# Allegro board Fly_2_0425p1.brd
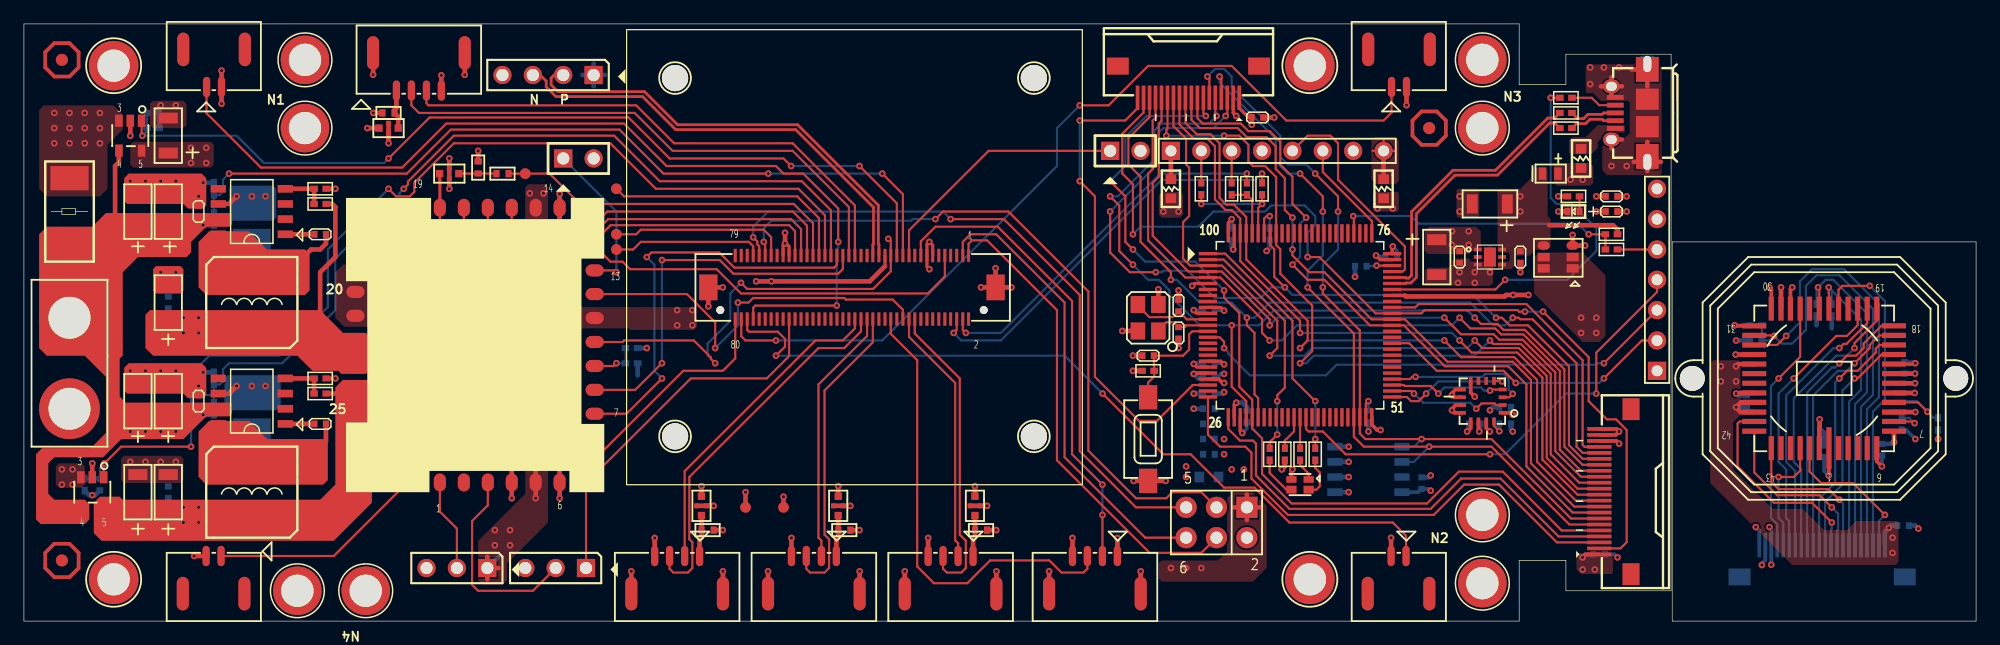
[diagram p0: board, top side]
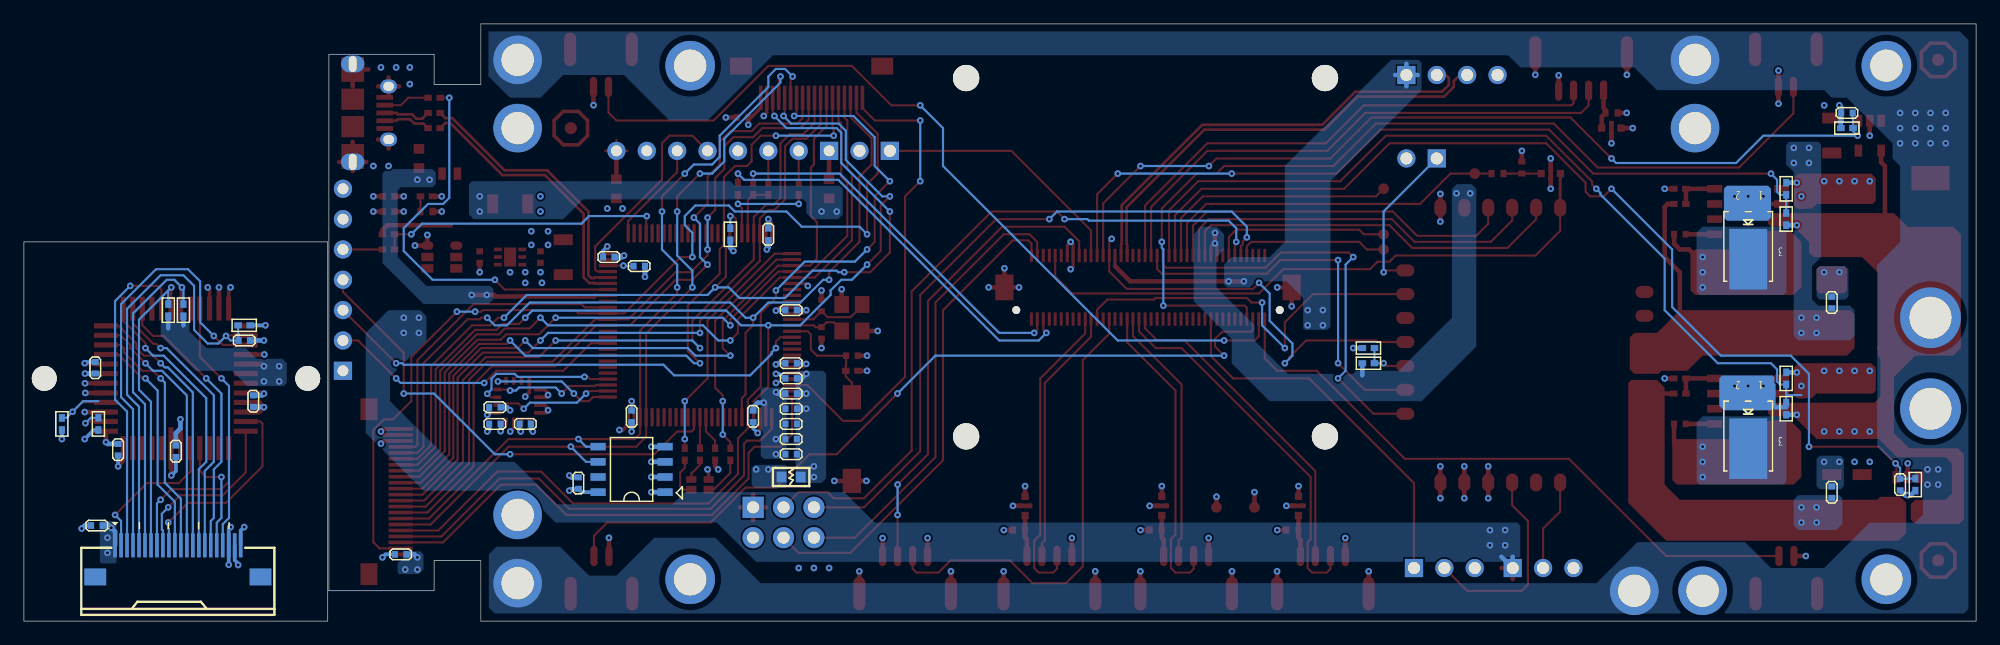
[diagram p1: board, bottom side, seen from below]

Outline 163.19 x 50 mm; copper layers: TOP, GND02, PWR03, BOTTOM. Coordinates in mm from the lower left corner of the outline.
Outline path: 0,50 125,50 125,44.92 128.91,44.92 128.91,47.46 137.7,47.46 137.7,2.54 128.91,2.54 128.91,5.08 125,5.08 125,0 0,0 0,50 ; 137.79,31.75 137.79,0 163.19,0 163.19,31.75 137.79,31.75

## Design rules (mm)
net group D_N: nets D_N NETR26_1
net group D_P: nets D_P NETR28_1
net group OTG_D1: nets OTG_DM1 OTG_DP1

## Placement (name value [footprint] x y rotation side)
C1  0u1_25v  [C0402]  6.35 11.43 90 bottom
C2  10u  [C1206]  12.06 18.41 90 top
C3  10u  [C1206]  9.53 18.41 90 top
C4  0u1_25v  [C0402]  14.61 18.41 90 top
C5  0.01_25v  [C0402]  24.77 16.51 0 top
C6  10u  [C1206]  9.53 10.79 90 top
C7  220u  [C1206]  12.06 10.79 90 top
C8  0u1_25v  [C0402]  12.06 10.79 90 bottom
C9  10u  [C1206]  9.53 34.29 90 top
C10  10u  [C1206]  12.06 34.29 90 top
C11  0u1_25v  [C0402]  14.61 34.29 90 top
C12  0u1_25v  [C0402]  10.79 42.55 180 bottom
C13  0.01_25v  [C0402]  24.77 32.38 0 top
C14  220u  [C1206]  12.06 26.67 90 top
C15  10u  [C1206]  12.06 40.64 90 top
C16  0u1_25v  [C0402]  12.06 26.67 90 bottom
C17  0.1u_25v  [C0402]  155.32 14.35 90 bottom
C18  0.1u_25v  [C0402]  157.23 21.21 270 bottom
C19  0.1u_25v  [C0402]  150.5 14.22 90 bottom
C20  0.1u_25v  [C0402]  99.06 17.78 0 bottom
C21  0.1u_25v  [C0402]  99.06 19.05 0 bottom
C22  0.1u_25v  [C0402]  99.06 20.32 0 bottom
C23  0.1u_25v  [C0402]  144.78 23.5 180 bottom
C24  0.01u_25v  [C0402]  132.72 34.29 180 top
C25  2.2u_25v  [C0402]  132.72 35.56 180 top
C26  0.1u_25v  [C0402]  123.83 16.51 0 bottom
C27  0.01u_25v  [C0402]  121.28 16.51 180 bottom
C28  8p_25v  [C0402]  96.52 24.13 270 top
C29  8p_25v  [C0402]  96.52 26.42 270 top
C30  2.2u_25v  [C0402]  93.98 22.23 180 top
C31  2.2u_25v  [C0402]  111.76 29.72 0 bottom
C32  2.2u_25v  [C0402]  112.39 17.14 90 bottom
C33  0.1u_25v  [C0402]  99.06 13.97 0 bottom
C34  0.01u_25v  [C0402]  99.06 15.24 0 bottom
C35  0.1u_25v  [C0402]  99.06 16.51 0 bottom
C36  0.1u_25v  [C0402]  120.02 30.48 270 top
C37  2.2u_25v  [C1206]  118.11 30.48 270 top
C38  0.1u_25v  [C0402]  125.09 30.48 270 top
C39  2.2u_25v  [C1206]  122.56 34.92 180 top
C40  0.01u_25v  [C0402]  99.06 21.59 0 bottom
C41  0.01u_25v  [C0402]  100.97 32.38 90 bottom
C42  0.01u_25v  [C0402]  114.3 30.48 0 bottom
C43  0.01u_25v  [C0402]  102.23 17.14 270 bottom
C44  0.01u_25v  [C0402]  99.06 26.04 180 bottom
C45  0.01u_25v  [C0402]  123.83 17.91 0 bottom
C46  0.01u_25v  [C0402]  131.7 5.59 180 bottom
C47  0.01u_25v  [C0402]  157.1 8 180 bottom
C48  0.01u_25v  [C0402]  144.02 18.41 270 bottom
C49  0.01u_25v  [C0402]  103.12 42.16 180 top
C50  0.1u_25v  [C0402]  116.84 11.56 90 bottom
D1  DIODE-TVS  [0402-TVS]  57.15 7.62 0 top
D2  DIODE-TVS  [0402-TVS]  68.58 7.62 0 top
D3  DIODE-TVS  [0402-TVS]  30.48 42.55 180 top
D4  DIODE-TVS  [0402-TVS]  80.01 7.62 0 top
D5  DIODE-TVS  [0402-TVS]  37.97 37.97 90 top
D6  -  [TO-277A]  19.05 18.41 0 bottom
D7  TO-227A  [TO-277A]  19.05 34.29 0 bottom
D8  schottky  [D0603]  127.64 37.47 180 top
D9  RED  [LED0402]  129.54 34.29 180 top
D300  DIODE-TVS  [0402-TVS]  40.01 37.47 0 top
J1  miniUSB  [USBMICRO5_6A]  137.16 42.55 90 top
K1  TPS5430  [HSOIC-8]  19.05 18.41 90 top
K2  TPS5430  [HSOIC-8]  19.05 34.29 90 top
K3  INA169  [SOT-23-5]  5.71 10.79 180 top
K4  INA169  [SOT-23-5]  8.89 40.64 180 top
L1  Kyocera_KNH16C104DA5TS_EMI_filter  [KYOCERA-KNH16-DA]  56.64 9.65 270 top
L2  Kyocera_KNH16C104DA5TS_EMI_filter  [KYOCERA-KNH16-DA]  68.07 9.65 270 top
L3  Kyocera_KNH16C104DA5TS_EMI_filter  [KYOCERA-KNH16-DA]  30.48 41.27 0 top
L4  Kyocera_KNH16C104DA5TS_EMI_filter  [KYOCERA-KNH16-DA]  79.5 9.65 270 top
L5  Kyocera_KNH16C104DA5TS_EMI_filter  [KYOCERA-KNH16-DA]  35.56 37.47 180 top
L6  Inductor  [CKCD5D28]  19.05 10.79 0 top
L7  Inductor  [CKCD5D28]  19.05 26.67 0 top
L8  EEBCRKIV  [L0603]  130.18 38.73 90 top
L9  EEBCRKIV  [L0603]  99.06 12.06 0 bottom
L10  EEBCRKIV  [L0603]  95.89 36.2 270 top
L11  EEBCRKIV  [L0603]  113.67 36.2 270 top
LED1  ltst-c19he1wt  [LTST-C19HE1WT]  106.68 11.43 270 top
N1  esc_power  [ESC_POWER]  23.5 46.99 270 top
N2  esc_power  [ESC_POWER]  121.92 3.17 90 top
N3  esc_power  [ESC_POWER]  121.92 46.99 270 top
N4  esc_power  [ESC_POWER]  28.57 2.54 180 top
N5  exc_control  [EXC_CONTROL]  14.61 0 180 top
N6  exc_control  [EXC_CONTROL]  116.2 50.16 0 top
N7  exc_control  [EXC_CONTROL]  113.67 0 180 top
N8  exc_control  [EXC_CONTROL]  17.14 50.16 0 top
NOREF  -  [unnamed]  117.47 41.27 0 top
NOREF#2  -  [unnamed#2]  54.43 45.47 0 top
NOREF#3  -  [unnamed]  3.17 5.08 0 top
NOREF#4  -  [unnamed#3]  7.5 46.5 0 top
NOREF#5  -  [unnamed#3]  107.5 3.5 0 top
NOREF#6  -  [unnamed#3]  107.5 46.5 0 top
NOREF#7  -  [unnamed]  3.17 46.99 0 top
NOREF#8  -  [unnamed#2]  54.43 15.47 0 top
NOREF#9  -  [unnamed#2]  84.43 15.47 0 top
NOREF#10  -  [unnamed#2]  84.43 45.47 0 top
NOREF#11  -  [unnamed#3]  7.5 3.5 0 top
P1  -  [CON-DF17-80M]  69.22 27.94 0 top
P2  Header_3X2  [HDR2X3]  99.69 8.26 180 top
P3  CLICKMATE_1.25_4  [CLICKMATE_V4]  54.61 0 180 top
P4  Header_2  [HDR1X2]  90.81 39.37 0 top
P5  CLICKMATE_1.25_4  [CLICKMATE_V4]  89.53 0 180 top
P6  CLICKMATE_1.25_4  [CLICKMATE_V4]  66.04 0 180 top
P7  CLICKMATE_1.25_4  [CLICKMATE_V4]  33.01 49.87 0 top
P8  Header_3  [HDR1X3]  46.99 4.45 180 top
P9  Header_3  [HDR1X3]  38.73 4.45 180 top
P10  CLICKMATE_1.25_4  [CLICKMATE_V4]  77.47 0 180 top
P11  Header_2  [HDR1X2]  45.09 38.73 0 top
P12  Header_4  [HDR1X4]  47.62 45.72 180 top
P13  Header_2  [VBAT_JACK]  3.81 25.4 270 top
P14  Header_7  [HDR1X7]  136.53 20.95 90 top
P15  Header_18  [FPC-18_0P5]  101.6 43.81 180 top
P16  Header_22  [FPC-22_0P5]  131.7 5.59 90 top
P17  Header_8  [HDR1X8]  95.89 39.37 0 top
P18  Header_22  [FPC-22_0P5]  155.57 6.35 180 bottom
PSM1  Power_Selection_module  [PSM]  37.47 22.86 90 top
Q1  NTGS4111P  [TSOP-6]  128.27 30.48 90 top
R1  0R  [R0402]  50.8 21.59 0 bottom
R2  0R  [R0402]  50.8 22.86 180 bottom
R3  0.005R  [2512]  3.81 34.29 90 top
R4  4.7k  [R0402]  24.77 20.32 0 top
R5  15k  [R0402]  24.77 19.05 180 top
R6  100k  [R0402]  5.08 11.43 270 bottom
R7  14k  [R0402]  15.88 17.78 270 bottom
R8  1k  [R0402]  15.88 20.32 270 bottom
R9  4.7k  [R0402]  24.77 36.2 0 top
R10  15k  [R0402]  24.77 34.92 180 top
R11  14k  [R0402]  15.88 33.66 270 bottom
R12  100k  [R0402]  10.79 41.27 0 bottom
R13  1k  [R0402]  15.88 36.2 270 bottom
R14  10k  [R0402]  144.78 24.77 180 bottom
R15  330R  [R0402]  149.86 26.04 90 bottom
R16  330R  [R0402]  151.13 26.04 90 bottom
R17  1k  [R0402]  132.72 32.38 180 top
R18  1k  [R0402]  156.97 16.51 270 bottom
R19  0R  [R0402]  132.72 31.11 0 top
R20  1k  [R0402]  160.02 16.51 270 bottom
R21  10k  [R0402]  105.41 13.97 90 top
R22  0R  [R0402]  103.5 36.2 270 top
R23  0R  [R0402]  102.23 36.2 270 top
R24  10k  [R0402]  104.14 32.38 90 bottom
R25  10k  [R0402]  93.98 20.95 0 top
R26  22R  [R0402]  128.91 41.27 0 top
R27  270R  [R0402]  129.54 35.56 180 top
R28  100R  [R0402]  128.91 42.55 0 top
R29  10k  [R0402]  128.91 43.81 0 top
R30  100R  [R0402]  98.42 36.2 270 top
R31  100R  [R0402]  100.97 36.2 270 top
R32  330R  [R0402]  106.68 13.97 90 top
R33  330R  [R0402]  107.95 13.97 90 top
R34  330R  [R0402]  104.14 13.97 90 top
S1  PAD.04  [PAD_04X04]  63.5 9.53 0 top
S2  PAD.04  [PAD_04X04]  49.53 36.2 0 top
S3  PAD.04  [PAD_04X04]  49.53 32.38 0 top
S4  PAD.04  [PAD_04X04]  49.53 31.11 0 top
S5  PAD.04  [PAD_04X04]  60.33 9.53 0 top
S6  PAD.04  [PAD_04X04]  41.91 37.47 0 top
S7  RESET  [SWITCH]  93.98 15.24 270 top
U1  MT9V034  [CLCC-48]  150.5 20.32 180 top
U2  LENSMOUNT_M12  [LENSMOUNT_LARGE_M12]  150.5 20.32 180 top
U3  STM32F407VGT6  [STM-LQFP100_N]  106.68 24.77 0 top
U4  -  [L3GD20]  121.92 18.41 180 top
U5  TPS73733-6P  [S-PDSO-N6]  122.56 30.48 0 top
U6  24AA128  [HSOIC-8]  112.39 12.7 90 bottom
X1  OSCILLATOR-3.2X2.5  [3225SA]  93.99 25.39 90 top

## Library data of the parts
C1 C4 C5 C8 C11-C13 C16-C36 C38 C40-C50 = C0402
C2 C3 C6 C7 C9 C10 C14 C15 C37 C39 = C1206
D1-D5 D300 = 0402-TVS
D6 D7 = TO-277A
D8 = D0603
D9 = LED0402
J1 = USBMICRO5_6A
K1 K2 U6 = HSOIC-8
K3 K4 = SOT-23-5
L1-L5 = KYOCERA-KNH16-DA
L6 L7 = CKCD5D28
L8-L11 = L0603
LED1 = LTST-C19HE1WT
N1-N4 = ESC_POWER
N5-N8 = EXC_CONTROL
P1 = CON-DF17-80M
P2 = HDR2X3
P3 P5-P7 P10 = CLICKMATE_V4
P4 P11 = HDR1X2
P8 P9 = HDR1X3
P12 = HDR1X4
P13 = VBAT_JACK
P14 = HDR1X7
P15 = FPC-18_0P5
P16 P18 = FPC-22_0P5
P17 = HDR1X8
PSM1 = PSM
Q1 = TSOP-6
R1 R2 R4-R25 R27 R29-R34 = R0402
R3 = 2512
R26 = R0402: signal model: R0402_22R
R28 = R0402: signal model: R0402_100R
S1-S6 = PAD_04X04
S7 = SWITCH
U1 = CLCC-48
U2 = LENSMOUNT_LARGE_M12
U3 = STM-LQFP100_N
U4 = L3GD20
U5 = S-PDSO-N6
X1 = 3225SA

## Footprints (pads in the part's own frame, mm; a bottom-side part is the same pattern mirrored in y, then rotated)
0402-TVS
  rect 0.508x0.61 smd: A(0.508,0) C(-0.5,0)
2512
  rect 2.032x3.2 smd: 1(-2.794,0) 2(2.794,0)
3225SA
  rect 1.422x1.219 smd: 1(-1.1,-0.85) 2(1.118,-0.85) 3(1.118,0.864) 4(-1.1,0.864)
C0402
  rect 0.508x0.559 smd: 1(-0.483,0) 2(0.483,0)
C1206
  rect 0.914x1.6 smd: 1(-1.45,0) 2(1.473,0)
CKCD5D28
  rect 6.35x2.413 smd: 1(0,2.248) 2(0,-2.248)
CLCC-48
  rect 0.432x3.505 smd: 1(-0.4,5.842)
  rect 0.432x2.007 smd: 2(-1.2,5.842) 3(-2,5.842) 4(-2.8,5.842) 5(-3.6,5.842) 6(-4.4,5.842) 19(-4.4,-5.84) 20(-3.6,-5.84) 21(-2.8,-5.84) 22(-2,-5.84) 23(-1.2,-5.84) 24(-0.4,-5.84) 25(0.406,-5.84) 26(1.219,-5.84) 27(2.007,-5.84) 28(2.819,-5.84) 29(3.607,-5.84) 30(4.42,-5.84) 43(4.42,5.842) 44(3.607,5.842) 45(2.819,5.842) 46(2.007,5.842) 47(1.219,5.842) 48(0.406,5.842)
  rect 2.007x0.432 smd: 7(-5.84,4.42) 8(-5.84,3.607) 9(-5.84,2.819) 10(-5.84,2.007) 11(-5.84,1.219) 12(-5.84,0.406) 13(-5.84,-0.4) 14(-5.84,-1.2) 15(-5.84,-2) 16(-5.84,-2.8) 17(-5.84,-3.6) 18(-5.84,-4.4) 31(5.842,-4.4) 32(5.842,-3.6) 33(5.842,-2.8) 34(5.842,-2) 35(5.842,-1.2) 36(5.842,-0.4) 37(5.842,0.406) 38(5.842,1.219) 39(5.842,2.007) 40(5.842,2.819) 41(5.842,3.607) 42(5.842,4.42)
CLICKMATE_V4
  oval 0.61x1.702 smd: 1(-1.875,-5.45) 2(-0.625,-5.45) 3(0.635,-5.45) 4(1.88,-5.45)
  oval 1.016x2.819 smd: 5(-3.825,-2.3) 6(3.835,-2.3)
CON-DF17-80M
  round 0.66 hole 0.66 unplated: (-11,-1.9) (11.024,-1.9)
  oval 0.254x1.118 smd: 1(9.754,2.667)
  rect 0.254x1.118 smd: 2(9.754,-2.65) 3(9.271,2.667) 4(9.271,-2.65) 5(8.763,2.667) 6(8.763,-2.65) 7(8.255,2.667) 8(8.255,-2.65) 9(7.772,2.667) 10(7.772,-2.65) 11(7.264,2.667) 12(7.264,-2.65) 13(6.756,2.667) 14(6.756,-2.65) 15(6.274,2.667) 16(6.274,-2.65) 17(5.766,2.667) 18(5.766,-2.65) 19(5.258,2.667) 20(5.258,-2.65) 21(4.775,2.667) 22(4.775,-2.65) 23(4.267,2.667) 24(4.267,-2.65) 25(3.759,2.667) 26(3.759,-2.65) 27(3.251,2.667) 28(3.251,-2.65) 29(2.769,2.667) 30(2.769,-2.65) 31(2.261,2.667) 32(2.261,-2.65) 33(1.753,2.667) 34(1.753,-2.65) 35(1.27,2.667) 36(1.27,-2.65) 37(0.762,2.667) 38(0.762,-2.65) 39(0.254,2.667) 40(0.254,-2.65) 41(-0.25,2.667) 42(-0.25,-2.65) 43(-0.75,2.667) 44(-0.75,-2.65) 45(-1.25,2.667) 46(-1.25,-2.65) 47(-1.75,2.667) 48(-1.75,-2.65) 49(-2.25,2.667) 50(-2.25,-2.65) 51(-2.75,2.667) 52(-2.75,-2.65) 53(-3.25,2.667) 54(-3.25,-2.65) 55(-3.75,2.667) 56(-3.75,-2.65) 57(-4.25,2.667) 58(-4.25,-2.65) 59(-4.75,2.667) 60(-4.75,-2.65) 61(-5.25,2.667) 62(-5.25,-2.65) 63(-5.75,2.667) 64(-5.75,-2.65) 65(-6.25,2.667) 66(-6.25,-2.65) 67(-6.75,2.667) 68(-6.75,-2.65) 69(-7.25,2.667) 70(-7.25,-2.65) 71(-7.75,2.667) 72(-7.75,-2.65) 73(-8.25,2.667) 74(-8.25,-2.65) 75(-8.75,2.667) 76(-8.75,-2.65) 77(-9.25,2.667) 78(-9.25,-2.65) 79(-9.75,2.667) 80(-9.75,-2.65)
  rect 1.524x2.159 smd: 81(-12,0) 82(12.014,0)
D0603
  rect 0.635x1.041 smd: 1(-0.605,0) 2(0.68,0)
ESC_POWER
  round 4.064 hole 2.7: 1(0,0) 2(5.715,0)
EXC_CONTROL
  oval 0.61x1.702 smd: 1(-1.875,-5.45) 2(-0.625,-5.45)
  oval 1.016x2.819 smd: GND(1.325,-2.3) GND/2(-3.825,-2.3)
FPC-18_0P5
  rect 1.829x1.422 smd: (-1.657,-2.651) (10.157,-2.651)
  rect 0.305x2.032 smd: 1(0,0) 2(0.5,0) 3(1,0) 4(1.5,0) 5(2,0) 6(2.5,0) 7(3,0) 8(3.5,0) 9(4,0) 10(4.5,0) 11(5,0) 12(5.5,0) 13(6,0) 14(6.5,0) 15(7,0) 16(7.5,0) 17(8,0) 18(8.5,0)
FPC-22_0P5
  rect 1.829x1.422 smd: (-1.657,-2.651) (12.157,-2.651)
  rect 0.305x2.032 smd: 1(0,0) 2(0.5,0) 3(1,0) 4(1.5,0) 5(2,0) 6(2.5,0) 7(3,0) 8(3.5,0) 9(4,0) 10(4.5,0) 11(5,0) 12(5.5,0) 13(6,0) 14(6.5,0) 15(7,0) 16(7.5,0) 17(8,0) 18(8.5,0) 19(9,0) 20(9.5,0) 21(10,0) 22(10.5,0)
HDR1X2
  rect 1.524x1.524 hole 1.016: 1(0,0)
  round 1.524 hole 1.016: 2(2.54,0)
HDR1X3
  rect 1.524x1.524 hole 1.016: 1(0,0)
  round 1.524 hole 1.016: 2(2.54,0) 3(5.08,0)
HDR1X4
  rect 1.524x1.524 hole 1.016: 1(0,0)
  round 1.524 hole 1.016: 2(2.54,0) 3(5.08,0) 4(7.62,0)
HDR1X7
  rect 1.524x1.524 hole 0.914: 1(0,0)
  round 1.524 hole 0.914: 2(2.54,0) 3(5.08,0) 4(7.62,0) 5(10.16,0) 6(12.7,0) 7(15.24,0)
HDR1X8
  rect 1.524x1.524 hole 0.914: 1(0,0)
  round 1.524 hole 0.914: 2(2.54,0) 3(5.08,0) 4(7.62,0) 5(10.16,0) 6(12.7,0) 7(15.24,0) 8(17.78,0)
HDR2X3
  rect 1.778x1.778 hole 1.016: 1(-2.54,-1.27)
  round 1.778 hole 1.016: 2(-2.54,1.27) 3(0,-1.27) 4(0,1.27) 5(2.54,-1.27) 6(2.54,1.27)
HSOIC-8
  rect 0.635x1.27 smd: 1(-1.905,-2.8) 2(-0.635,-2.8) 3(0.635,-2.8) 4(1.905,-2.8) 5(1.905,2.8) 6(0.635,2.8) 7(-0.635,2.8) 8(-1.905,2.8)
KYOCERA-KNH16-DA
  rect 0.61x0.61 smd: 1(-0.8,0) 2(0.813,0)
  rect 0.406x0.406 smd: 3(0,0.406) 4(0,-0.4)
L3GD20
  rect 0.66x0.305 smd: 1(-1.7,0.975) 2(-1.7,0.325) 3(-1.7,-0.325) 4(-1.7,-0.975) 9(1.7,-0.975) 10(1.7,-0.325) 11(1.7,0.325) 12(1.7,0.975)
  rect 0.305x0.66 smd: 5(-0.975,-1.7) 6(-0.325,-1.7) 7(0.325,-1.7) 8(0.975,-1.7) 13(0.975,1.7) 14(0.325,1.7) 15(-0.325,1.7) 16(-0.975,1.7)
L0603
  rect 0.813x0.889 smd: 1(-0.8,0) 2(0.8,0)
LED0402
  rect 0.508x0.635 smd: 1(-0.5,0) 2(0.5,0)
LENSMOUNT_LARGE_M12
  round 2.086 hole 2.108 unplated: (-11,0) (11.024,0)
LTST-C19HE1WT
  rect 0.55x0.85 smd: 1(-0.425,0.725) 4(-0.425,-0.725)
  rect 0.65x0.85 smd: 2(0.425,0.725) 3(0.425,-0.725)
PAD_04X04
  round 0.9 smd: 1(0,0)
PSM
  oval 1.5x1.016 smd: 1(-11.25,2.692) 2(-11.25,0.686) 3(-11.25,-1.317) 4(-11.25,-3.317) 5(-11.25,-5.317) 6(-11.25,-7.317) 14(11.75,-7.317) 15(11.75,-5.317) 16(11.75,-3.317) 17(11.75,-1.317) 18(11.75,0.686) 19(11.75,2.692)
  oval 1.016x1.524 smd: 7(-5.5,-10.25) 8(-3.5,-10.25) 9(-1.5,-10.25) 10(0.508,-10.25) 11(2.515,-10.25) 12(4.521,-10.25) 13(6.502,-10.25) 20(4.7,9.75) 21(2.7,9.75) 22(0.6,9.75) 23(-1.4,9.75) 24(-3.5,9.75) 25(-5.5,9.75)
R0402
  rect 0.635x0.508 smd: 1(-0.508,0) 2(0.508,0)
S-PDSO-N6
  rect 0.66x0.305 smd: 1(-1.016,0.635) 2(-1.016,0) 3(-1.016,-0.635) 4(1.016,-0.635) 5(1.016,0) 6(1.016,0.635)
  rect 1x1.6 smd: 7(0,0)
SOT-23-5
  rect 0.635x1.016 smd: 1(-0.95,-1.25) 2(0,-1.25) 3(0.95,-1.25) 4(0.95,1.25) 5(-0.95,1.25)
STM-LQFP100_N
  rect 1.524x0.279 smd: 1(-7.7,6) 2(-7.7,5.5) 3(-7.7,5) 4(-7.7,4.5) 5(-7.7,4) 6(-7.7,3.5) 7(-7.7,3) 8(-7.7,2.5) 9(-7.7,2) 10(-7.7,1.5) 11(-7.7,1) 12(-7.7,0.5) 13(-7.7,0) 14(-7.7,-0.5) 15(-7.7,-1) 16(-7.7,-1.5) 17(-7.7,-2) 18(-7.7,-2.5) 19(-7.7,-3) 20(-7.7,-3.5) 21(-7.7,-4) 22(-7.7,-4.5) 23(-7.7,-5) 24(-7.7,-5.5) 25(-7.7,-6) 51(7.7,-6) 52(7.7,-5.5) 53(7.7,-5) 54(7.7,-4.5) 55(7.7,-4) 56(7.7,-3.5) 57(7.7,-3) 58(7.7,-2.5) 59(7.7,-2) 60(7.7,-1.5) 61(7.7,-1) 62(7.7,-0.5) 63(7.7,0) 64(7.7,0.5) 65(7.7,1) 66(7.7,1.5) 67(7.7,2) 68(7.7,2.5) 69(7.7,3) 70(7.7,3.5) 71(7.7,4) 72(7.7,4.5) 73(7.7,5) 74(7.7,5.5) 75(7.7,6)
  rect 0.279x1.524 smd: 26(-6,-7.7) 27(-5.5,-7.7) 28(-5,-7.7) 29(-4.5,-7.7) 30(-4,-7.7) 31(-3.5,-7.7) 32(-3,-7.7) 33(-2.5,-7.7) 34(-2,-7.7) 35(-1.5,-7.7) 36(-1,-7.7) 37(-0.5,-7.7) 38(0,-7.7) 39(0.5,-7.7) 40(1,-7.7) 41(1.5,-7.7) 42(2,-7.7) 43(2.5,-7.7) 44(3,-7.7) 45(3.5,-7.7) 46(4,-7.7) 47(4.5,-7.7) 48(5,-7.7) 49(5.5,-7.7) 50(6,-7.7) 76(6,7.7) 77(5.5,7.7) 78(5,7.7) 79(4.5,7.7) 80(4,7.7) 81(3.5,7.7) 82(3,7.7) 83(2.5,7.7) 84(2,7.7) 85(1.5,7.7) 86(1,7.7) 87(0.5,7.7) 88(0,7.7) 89(-0.5,7.7) 90(-1,7.7) 91(-1.5,7.7) 92(-2,7.7) 93(-2.5,7.7) 94(-3,7.7) 95(-3.5,7.7) 96(-4,7.7) 97(-4.5,7.7) 98(-5,7.7) 99(-5.5,7.7) 100(-6,7.7)
SWITCH
  rect 2.032x1.524 smd: 1(-3.5,0) 2(3.5,0)
TO-277A
  rect 1.016x0.813 smd: 1(-0.927,0) 2(0.927,0)
  rect 3.175x5.08 smd: 3(0,3.988)
TSOP-6
  rect 0.711x1.016 smd: 1(-0.95,-1.2) 2(0,-1.2) 5(0,1.219) 6(-0.95,1.219)
  oval 0.711x1.016 smd: 3(0.965,-1.2) 4(0.965,1.219)
unnamed
  round 1.016 smd: 1(0,0)
unnamed#3
  round 4.15 hole 2.7: 1(0,0)
unnamed#2
  round 2.2 hole 2.2 unplated: (0,0)
USBMICRO5_6A
  rect 0.406x1.397 smd: 1(-1.3,4.125) 2(-0.65,4.125) 3(0,4.125) 4(0.65,4.125) 5(1.3,4.125)
  oval 1.143x1.397 hole 0.762x0.889: 6(-2.225,4.45) 7(2.225,4.45)
  rect 2.083x1.905 hole 1.346x0.66: 8(-4.1,1.45) 11(4.1,1.45)
  rect 1.778x1.905 smd: 9(-1.15,1.45) 10(1.15,1.45)
VBAT_JACK
  round 5.08 hole 3.505: 1(0,0) 2(7.62,0)

## Nets
AVDD_3V3_FLOW: C20.1 C21.1 C22.1 C33.1 C34.1 C35.1 C45.2 C46.2 C47.2 C48.2 C49.2 L9.1 P15.1 P16.1 P18.1 R15.1 R16.1 U1.35 U1.39 U1.40 U3.21 U4.1
GND: C1.1 C2.2 C3.2 C4.2 C6.2 C7.2 C8.2 C9.2 C10.2 C11.2 C12.1 C14.2 C15.2 C16.2 C17.2 C18.2 C19.2 C20.2 C21.2 C22.2 C23.2 C24.2 C25.2 C26.2 C27.2 C28.2 C29.1 C30.2 C31.1 C32.1 C33.2 C34.2 C35.2 C36.2 C37.2 C38.2 C39.2 C40.1 C41.1 C42.1 C43.1 C44.1 C45.1 C46.1 C47.1 C48.1 C49.1 C50.2 D1.A D2.A D3.A D4.A D5.A D6.1 D6.2 D7.1 D7.2 D9.2 J1.5 J1.6 J1.7 J1.8 J1.9 J1.10 J1.11 K1.6 K2.6 K3.2 K4.2 L1.3 L1.4 L2.3 L2.4 L3.3 L3.4 L4.3 L4.4 L5.3 L5.4 N1.2 N2.2 N3.2 N4.2 N5.2 N6.2 N7.2 N8.2 P1.13 P1.15 P1.81 P1.82 P2.2 P3.4 P3.5 P3.6 P4.2 P5.4 P5.5 P5.6 P6.4 P6.5 P6.6 P7.4 P7.5 P7.6 P8.3 P9.3 P10.4 P10.5 P10.6 P11.2 P12.4 P13.2 P14.7 P15.2 P16.21 P16.22 P17.4 P17.7 P18.21 P18.22 PSM1.6 PSM1.14 Q1.3 R2.1 R4.2 R6.2 R8.1 R9.2 R12.2 R13.1 R21.1 R24.1 S5.1 S7.2 U1.7 U1.9 U1.11 U1.12 U1.13 U1.29 U1.34 U1.38 U1.48 U3.10 U3.20 U3.27 U3.74 U3.99 U4.8 U4.9 U4.10 U4.11 U4.12 U4.13 U5.3 U5.7 U6.1 U6.2 U6.3 U6.4 X1.2 X1.4
VBAT: C2.1 C3.1 C4.1 C9.1 C10.1 C11.1 K1.7 K2.7 K3.4 K4.4 P13.1 R3.1 R7.2 R11.2
VBUS: P1.29 P12.1 PSM1.11 PSM1.20 PSM1.21
VBUS_VALID: P1.59 PSM1.18
VDD_3V3_FLOW: C17.1 C18.1 C19.1 C24.1 C25.1 C26.1 C36.1 C37.1 C40.2 C41.2 C42.2 C43.2 C44.2 C50.1 L9.2 L11.2 LED1.4 P14.6 P16.20 P18.20 R14.2 R18.2 R20.2 R25.1 R27.2 U1.1 U1.6 U1.14 U1.28 U1.30 U1.31 U3.6 U3.11 U3.19 U3.22 U3.28 U3.50 U3.75 U3.100 U4.15 U4.16 U5.1 U6.8
VDD_3V3_USER: P9.2 PSM1.1
VDD_3V3_USER_EN: PSM1.9 R1.1 R2.2
VDD_5V_BACKUP: C14.1 C15.1 C16.1 K4.5 L7.2 PSM1.22 PSM1.23 R10.1
VDD_5V_BRICK: C6.1 C7.1 C8.1 K3.5 L6.2 PSM1.24 PSM1.25 R5.1
VDD_5V_FLOW: C38.1 C39.1 D8.2 L10.2 Q1.4 R17.1 U5.4 U5.6
VDD_5V_HIPOWER: P9.1 PSM1.5 Q1.1 Q1.2 Q1.5 Q1.6
VDD_5V_HIPOWER_OC: P1.45 PSM1.7
VDD_5V_IN_PROT: P1.61 P1.63 PSM1.15 R1.2
VDD_5V_PERIPH: L1.1 L2.1 L3.1 L4.1 P2.1 P5.1 PSM1.4 S1.1
VDD_5V_PERIPH_EN: P1.27 PSM1.10
VDD_5V_PERIPH_OC: P1.43 PSM1.8
VDD_BACKUP_VALID: P1.57 PSM1.17
VDD_BRICK_VALID: P1.55 PSM1.16
VDD_SERVO: D300.A P1.53 S6.1
VDD_SERVO_IN: L5.2 P1.9 PSM1.19
ADC123_IN10: P14.3 U3.15
ALARM: P1.24 PSM1.12
AUX_BATT_CURRENT_SENS: C12.2 K4.1 P1.25 R12.1
AUX_BATT_VOLTAGE_SENS: P1.23 R11.1 R13.2
BAT_ESC: K3.3 K4.3 N1.1 N2.1 N3.1 N4.1 R3.2
BATT_CURRENT_SENS_PROT: C1.2 K3.1 P1.49 R6.1
BATT_VOLTAGE_SENS_PROT: P1.47 R7.1 R8.2
BUZZER_OUT: P11.1 PSM1.13
CAN_H_2: P1.41 P7.2
CAN_L_2: P1.39 P7.3
D_N: J1.2 R26.2
D_P: J1.3 R28.2
FMU-SWCLK: P1.3 P2.6
FMU-SWDIO: P1.1 P2.4
I2C_2_SCL: P1.6 R22.1
I2C_2_SDA: P1.4 R23.1
IO-CH1-PROT: N5.1 P1.80
IO-CH2-PROT: N6.1 P1.78
IO-CH3-PROT: N7.1 P1.76
IO-CH4-PROT: N8.1 P1.74
IO-LED_SAFET_PROT: P1.28 P5.3
IO-SWCLK: P1.71 P2.5
IO-SWDIO: P1.69 P2.3
NETC5_1: C5.1 K1.1
NETC5_2: C5.2 D6.3 K1.8 L6.1
NETC13_1: C13.1 K2.1
NETC13_2: C13.2 D7.3 K2.8 L7.1
NETC27_1: C27.1 U4.14
NETC30_1: C30.1 R25.2 S7.1 U3.14
NETC31_2: C31.2 U3.73
NETC32_2: C32.2 U3.49
NETD1_C: D1.C L1.2 P3.1
NETD3_C: D3.C L3.2 P7.1
NETD4_C: D4.C L4.2 P10.1
NETD5_C: D5.C D300.C L5.1
NETD8_1: D8.1 L8.1 U3.68
NETD9_1: D9.1 R27.1
NETJ1_1: J1.1 L8.2
NETJ1_4: J1.4 R29.2
NETK1_4: K1.4 R4.1 R5.2
NETK2_4: K2.4 R9.1 R10.2
NETL10_1: L10.1 P17.1
NETL11_1: L11.1 P17.8
NETLED1_1: LED1.1 R32.1
NETLED1_2: LED1.2 R33.1
NETLED1_3: LED1.3 R34.1
NETP17_2: P17.2 R30.1
NETP17_3: P17.3 R31.1
NETP17_5: P17.5 U3.72
NETP17_6: P17.6 U3.76
NETR18_1: R18.1 U1.8
NETR20_1: R20.1 U1.10
NETR21_2: R21.2 U3.37
NETR24_2: R24.2 U3.94
NETR26_1: R26.1 U3.70
NETR28_1: R28.1 U3.71
NETR29_1: R29.1 U3.69
NETR32_2: R32.2 U3.38
NETR33_2: R33.2 U3.1
NETR34_2: R34.2 U3.2
OSC_IN: C29.2 U3.12 X1.3
OSC_OUT: C28.1 U3.13 X1.1
OTG_DM1: P1.33 P12.3
OTG_DP1: P1.31 P12.2
PA2_TIM5_CH3_EXPOSURE: P16.3 P18.3 U1.23 U3.25
PA3_TIM5_CH4_STANDBY: P16.4 P18.4 U1.33 U3.26
PA4_DCMI_HSYNC: P15.5 P16.16 P18.16 U1.20 U3.29
PA5_CAM_NRESET: C23.1 P15.7 P16.5 P18.5 R14.1 U1.32 U3.30
PA6_DCMI_PCLK: P15.16 P16.18 P18.18 U1.46 U3.31
PB6_DCMI_D5: P15.13 P16.13 P18.13 U1.17 U3.92
PB7_DCMI_VSYNC: P15.3 P16.17 P18.17 U1.21 U3.93
PB8_I2C1_SCL: R22.2 R30.2 U3.95
PB9_I2C1_SDA: R23.2 R31.2 U3.96
PB10_I2C2_SCL: P15.4 P16.6 P18.6 R15.2 U1.25 U3.47 U6.6
PB11_I2C2_SDA: P15.6 P16.7 P18.7 R16.2 U1.24 U3.48 U6.5
PB12_SPI2_NSS: U3.51 U4.5
PB13_SPI2_SCK: U3.52 U4.2
PB14_SPI2_MISO: U3.53 U4.4
PB15_SPI2_MOSI: U3.54 U4.3
PC6_DCMI_D0: P15.8 P16.8 P18.8 U1.43 U3.63
PC7_DCMI_D1: P15.9 P16.9 P18.9 U1.42 U3.64
PC8_TIM8_CH3_MASTERCLOCK: P15.17 P16.2 P18.2 U1.47 U3.65
PC9_TIM8_CH4_LED_OUT: P16.19 P18.19 U1.27 U3.66
PE0_DCMI_D2: P15.10 P16.10 P18.10 U1.41 U3.97
PE1_DCMI_D3: P15.11 P16.11 P18.11 U1.15 U3.98
PE4_DCMI_D4: P15.12 P16.12 P18.12 U1.16 U3.3
PE5_DCMI_D6: P15.14 P16.14 P18.14 U1.18 U3.4
PE6_DCMI_D7: P15.15 P16.15 P18.15 U1.19 U3.5
PERIPH_5V: D2.C L2.2 P6.1
PPM-SBUS-PROT: P1.62 P8.1
PRESSURE_SENS_IN: P1.21 P4.1
PWDN: P15.18 U3.23
PWM: P14.2 U3.60
RX_5V0_OUT: P8.2 PSM1.3
SAFETY: P1.17 P5.2
SERIAL1_RX: P1.38 P3.3
SERIAL1_TX: P1.40 P3.2
SERIAL2_RX: P1.34 P6.3
SERIAL2_TX: P1.36 P6.2
SERIAL3_RX: P1.20 P10.3
SERIAL3_TX: P1.22 P10.2
SONAR_TX: P14.5 R19.2
SPI_EXT_MISO: P1.67 S3.1
SPI_EXT_MOSI: P1.51 S2.1
SPI_EXT_SCK: P1.73 S4.1
UART4_RX: R17.2 R19.1 U3.79
US_FN1: P14.4 U3.39

Pads without a net: K1 2 3 5; K2 2 3 5; N5 GND GND/2; N6 GND GND/2; N7 GND GND/2; N8 GND GND/2; NOREF 1; NOREF#3 1; NOREF#4 1; NOREF#5 1; NOREF#6 1; NOREF#7 1; NOREF#11 1; P1 2 5 7 8 10 11 12 14 16 18 19 26 30 32 35 37 42 44 46 48 50 52 54 56 58 60 64 65 66 68 70 72 75 77 79; P14 1; PSM1 2; U1 2 3 4 5 22 26 36 37 44 45; U3 7 8 9 16 17 18 24 32 33 34 35 36 40 41 42 43 44 45 46 55 56 57 58 59 61 62 67 77 78 80 81 82 83 84 85 86 87 88 89 90 91; U4 6 7; U5 2 5; U6 7

## Via types
v1: diameter 0.559, hole 0.254, TOP to BOTTOM, 411 vias

## Routing (per net, layer and track width the routed paths; a pad name or vN(x,y) marks a point on that pad's centre or on a via; arc(x,y) is an arc through that point)
AVDD_3V3_FLOW: length 20.8
  TOP w0.279: C49.2 102.39,42.16 101.6,42.95 P15.1
  TOP w0.305: v1(124.46,17.27) 124.29,17.44 U4.1 ; v1(130.3,5.33) 130.56,5.59 P16.1 ; U3.21 97.85,20.77 v1(97.79,20.7)
  TOP w0.381: U1.35 143.31,21.52 v1(143.13,21.34) ; U1.39 143.54,18.31 v1(143.13,17.91) 143.13,17.88 143.51,17.5 U1.40 ; C49.2 v1(102.64,41.55)
  BOTTOM w0.381: C45.2 124.31,17.42 v1(124.46,17.27) ; C22.1 98.17,20.32 v1(97.79,20.7) ; v1(143.13,17.91) 143.15,17.93 C48.2 ; C47.2 156.08,8 v1(155.89,7.81) 155.57,7.49 P18.1 ; C20.1 v1(97.79,17.78) ; R15.1 149.86,24.77 ; C46.2 130.56,5.59 v1(130.3,5.33) ; C21.1 v1(97.79,19.05) ; R16.1 151.13,24.51
  vias: v1(97.16,12.95) v1(97.16,12.06) v1(130.3,4.32) v1(131.32,4.32) v1(141.86,21.34) v1(141.86,20.07) v1(143.13,20.07) v1(156.21,6.99) v1(156.21,5.71)
GND: length 256.6
  TOP w0.254: P1.13 75.97,31.47 v1(75.69,31.75) 75.49,31.55 P1.15 75.49,29.67 v1(75.69,29.46) ; v1(97.79,21.54) 97.79,21.52 98.04,21.27 U3.20 ; v1(100.33,25.99) 100.06,26.26 U3.10 ; v1(101.09,31.11) 101.18,31.2 U3.99
  TOP w0.279: P15.2 101.1,42.54 v1(101.35,42.29) ; v1(113.03,30.61) 113.37,30.26 U3.74 ; U3.27 101.18,18.12 v1(101.35,18.29)
  TOP w0.305: U4.9 119.68,19.39 119.38,19.09 v1(119.38,18.92) 119.56,18.74 U4.10 ; v1(120.65,15.88) 120.94,16.17 U4.13 ; P16.21 133.06,15.59 v1(133.35,15.88) 133.14,16.09 P16.22 ; v1(121.28,18.8) 120.94,19.14 U4.8 ; U4.11 119.68,18.09 119.38,17.79 v1(119.38,17.65) 119.59,17.44 U4.12
  TOP w0.381: v1(16.52,43.32) N8.2 v1(16.52,46.09) ; 134.41,46.19 135.25,46.19 J1.11 135.71,44.76 ; R4.2 v1(26.04,20.32) ; P6.4 v1(64.16,6.96) ; C11.2 v1(14.61,35.56) ; 132.71,39.57 J1.6 133.59,40.32 ; C24.2 v1(131.44,34.29) ; v1(35.56,38.73) L5.4 L5.3 v1(35.56,36.2) ; X1.2 v1(94.84,27.78) ; K3.2 v1(5.71,13.21) ; C28.2 v1(96.52,22.86) ; K1.6 17.14,19.05 v1(17.78,19.68) ; 132.71,44.02 J1.7 ; J1.7 133.59,44.77 ; J1.7 132.71,45.52 ; J1.7 131.83,44.77 ; v1(129.47,32.33) Q1.3 v1(130.51,31.45) ; U1.11 v1(158.06,19.1) ; P10.5 v1(81.29,4.17) ; P1.82 v1(82.55,27.94) ; P1.82 v1(81.23,29.54) ; P1.82 v1(80.01,27.94) ; P6.5 v1(69.86,4.17) ; v1(92.77,11.74) S7.2 v1(95.45,11.74) ; v1(57.22,26.35) P1.81 v1(58.42,27.94) ; K4.2 v1(8.89,40.64) ; v1(44.78,33.45) PSM1.14 v1(44.78,35.77) ; C25.2 v1(131.44,35.56) ; U1.48 150.09,16.1 150.11,16.13 v1(150.11,16.89) ; U1.12 v1(158.09,19.91) ; v1(105.16,12.7) 105.41,12.95 R21.1 ; P5.5 v1(93.36,4.17) ; U1.38 143.43,19.1 143.38,19.05 v1(143.13,19.05) ; N7.2 v1(114.29,6.98) ; U1.29 v1(146.89,27.94) ; P7.4 v1(34.89,45.69) ; v1(69.09,9.65) L2.3 L2.4 ; v1(156.34,14.99) 156.33,14.99 U1.7 ; L4.4 L4.3 v1(80.52,9.65) ; v1(57.66,9.65) L1.3 L1.4 ; J1.8 136.84,38.44 ; J1.8 134.58,38.44 ; J1.8 135.71,40.12 ; J1.8 135.71,37.68 ; P5.4 v1(87.66,6.96) ; P6.6 v1(62.2,4.17) ; v1(17.78,35.56) 17.14,34.92 K2.6 ; D4.A v1(81.28,7.62) ; P10.6 v1(73.63,4.17) ; N5.2 v1(14.23,5.45) ; D9.2 v1(128.27,34.29) ; U1.34 v1(143.1,22.32) ; v1(158.09,20.73) 158.08,20.72 U1.13 ; P10.4 v1(75.59,6.96) ; R9.2 v1(26.04,36.2) ; S5.1 v1(60.33,10.79) ; v1(44.78,10.29) PSM1.6 v1(44.78,12.95) ; D3.A v1(29.21,42.55) ; C29.1 v1(96.52,27.69) ; P3.6 v1(50.77,4.17) ; U1.9 v1(158.12,17.5) ; X1.4 v1(91.82,24.29) ; D5.A v1(37.97,39.37) ; P3.5 v1(58.43,4.17) ; C49.1 v1(104.52,42.16) ; N6.2 v1(115.58,43.19) ; v1(30.48,40.01) L3.4 L3.3 ; P3.4 v1(52.73,6.96) ; P7.6 v1(36.85,45.74) ; C38.2 v1(125.09,29.21) ; P7.5 v1(29.19,45.74) ; D2.A v1(69.85,7.62) ; P5.6 v1(85.7,4.17) ; C4.2 v1(14.61,19.68) ; C30.2 v1(92.71,22.23) ; D1.A v1(58.42,7.62)
  GND02 w0.381: 93.34,38.43 93.34,39.37 ; 93.34,39.37 92.41,39.37 ; 93.34,39.37 93.34,40.31 ; 93.34,39.37 94.28,39.37 ; 102.23,6.99 103.3,6.99 ; 102.23,6.99 102.23,8.05 ; 102.23,6.99 101.17,6.99 ; 102.23,6.99 102.23,5.92 ; 40.97,4.45 41.91,4.45 ; 41.91,4.45 41.91,5.38 ; 41.91,4.45 41.91,3.51 ; 41.91,4.45 42.85,4.45 ; 121.92,6.68 N2.2 ; N2.2 124.13,8.89 ; N2.2 121.92,11.1 ; N2.2 119.71,8.89 ; 136.53,35.26 P14.7 ; P14.7 135.59,36.2 ; P14.7 136.53,37.13 ; 102.57,39.37 103.5,39.37 ; 103.5,39.37 104.44,39.37 ; 103.5,39.37 103.5,40.31 ; 103.5,39.37 103.5,38.43 ; J1.8 136.87,38.44 ; J1.8 135.71,39.32 ; J1.8 134.55,38.44 ; J1.8 135.71,37.57 ; 23.5,39.07 N1.2 ; N1.2 25.7,41.27 ; N1.2 23.5,43.48 ; N1.2 21.29,41.27 ; 33.66,4.45 33.66,5.38 ; 33.66,4.45 34.59,4.45 ; 33.66,4.45 33.66,3.51 ; 33.66,4.45 32.72,4.45 ; J1.6 132.71,41.07 ; J1.6 133.59,40.32 ; J1.6 131.83,40.32 ; J1.6 132.71,39.57 ; 40.01,44.78 P12.4 ; P12.4 40.01,46.66 ; P12.4 40.94,45.72 ; P12.4 39.07,45.72 ; P13.2 6.53,17.78 ; P13.2 3.81,15.06 ; P13.2 1.09,17.78 ; P13.2 3.81,20.5 ; 121.92,39.07 N3.2 ; N3.2 119.71,41.27 ; N3.2 121.92,43.48 ; N3.2 124.13,41.27 ; 131.83,44.77 J1.7 ; J1.7 132.71,44.02 ; J1.7 132.71,45.52 ; J1.7 133.59,44.77 ; 46.69,38.73 P11.2 ; P11.2 48.56,38.73 ; P11.2 47.62,37.8 ; P11.2 47.62,39.67 ; P17.7 112.06,39.37 ; P17.7 110.19,39.37 ; P17.7 111.12,40.31 ; P17.7 111.12,38.43 ; N4.2 25.07,2.54 ; N4.2 20.65,2.54 ; N4.2 22.86,4.75
  BOTTOM w0.305: v1(145.29,4.7) 145.29,4.83 145.58,5.11 P18.21 ; C22.2 99.69,20.32 100.08,20.7 v1(100.33,20.7) ; v1(100.33,25.99) 100.29,26.04 C44.1 ; P18.22 145.07,7.58 v1(144.78,7.87) ; C40.1 97.84,21.59 v1(97.79,21.54) ; C46.1 132.97,5.59 v1(133.22,5.33)
  BOTTOM w0.381: C32.1 v1(112.39,15.88) ; U6.4 v1(110.74,14.61) ; C50.2 117.45,12.04 v1(117.6,12.19) ; v1(143.13,19.05) 143.28,18.9 C48.1 ; 109.59,13.34 v1(110.74,13.34) ; R24.1 104.14,31.24 v1(103.89,30.99) ; v1(113.03,30.61) 113.16,30.48 C42.1 ; v1(124.46,15.88) 124.31,16.03 C26.2 ; U6.1 v1(110.74,10.79) ; v1(150.11,16.89) 150.11,16.13 150.5,15.75 C19.2 ; v1(156.34,14.99) 156.18,14.83 C17.2 ; R12.2 11.3,41.92 11.28,41.95 C12.1 11.28,43.03 v1(11.43,43.18) ; R6.2 5.46,10.54 v1(5.71,10.54) 5.94,10.54 C1.1 ; C31.1 v1(111.28,28.83) ; C43.1 102.23,17.91 101.85,18.29 v1(101.35,18.29) ; R2.1 v1(52.07,22.86) ; C21.2 100.2,19.05 v1(100.33,19.18) ; C23.2 v1(143.13,23.5) ; C47.1 158.12,8 v1(158.37,7.75) ; 15.88,17.91 16.76,17.91 17.02,18.16 ; C45.1 122.81,17.91 v1(122.56,17.65) ; C27.2 120.8,16.03 v1(120.65,15.88) ; R8.1 v1(14.99,20.83) ; R13.1 v1(14.99,36.7) ; v1(101.09,31.11) 100.97,31.24 C41.1 ; 156.97,20.73 C18.2 v1(158.09,20.73) ; U6.2 v1(110.74,12.06)
  vias: v1(8.89,36.83) v1(8.89,20.95) v1(8.89,13.34) v1(10.16,36.83) v1(10.16,20.95) v1(10.16,13.34) v1(11.43,36.83) v1(11.43,29.21) v1(11.43,20.95) v1(11.43,13.34) v1(12.7,43.18) v1(12.7,36.83) v1(12.7,29.21) v1(12.7,20.95) v1(12.7,13.34) v1(19.05,35.56) v1(19.05,19.68) v1(20.19,35.56) v1(20.19,19.68) v1(100.33,15.24) v1(100.33,13.97) v1(119.89,28.32) v1(120.02,35.56) v1(120.02,34.29) v1(120.02,29.21) v1(121.28,29.21) v1(121.28,28.32) v1(122.56,29.21) v1(130.94,46.35) v1(130.94,44.96) v1(132.08,46.35) v1(132.72,38.1) v1(133.35,46.35) v1(133.99,38.1)
VBAT: length 7.4
  TOP w0.381: 7.62,33.91 7.62,38.1 7.94,38.42 K4.4
  BOTTOM w0.381: R7.2 v1(14.99,17.27) ; R11.2 v1(14.99,33.15)
  vias: v1(8.89,15.88) v1(10.16,15.88) v1(11.43,15.88) v1(12.7,15.88)
VBUS: length 15.9
  TOP w0.254: P1.29 71.98,29.72
  TOP w0.381: v1(61.21,28.45) v1(62.48,28.45) 70.71,28.45 71.98,29.72
  BOTTOM w0.381: P12.1 47.62,46.66 ; P12.1 47.62,44.78 ; P12.1 48.56,45.72 ; P12.1 46.69,45.72
  vias: v1(54.61,26.04) v1(54.61,24.77) v1(55.88,26.04) v1(55.88,24.77)
VBUS_VALID: length 32.7
  TOP w0.178: PSM1.18 36.78,33.64 39.18,31.24 47.13,31.24 49.04,33.15 63.97,33.15 64.46,32.65 P1.59
VDD_3V3_FLOW: length 50.1
  TOP w0.178: U4.16 122.9,16.35 v1(123.34,15.9)
  TOP w0.254: U3.100 100.68,33.37 v1(100.97,33.66) ; v1(97.66,28.07) 97.86,28.26 U3.6 ; U3.19 100.06,21.77 v1(100.33,21.49) ; U3.11 98.04,25.76 97.79,26.02 v1(97.79,26.04)
  TOP w0.279: v1(114.43,31.37) 114.38,31.32 U3.75 ; v1(101.85,15.75) 101.68,15.92 U3.28
  TOP w0.305: v1(150.88,12.19) 150.9,12.21 U1.1 ; v1(145.92,27.94) 146.08,27.79 U1.30 ; v1(158.12,21.59) 158.04,21.52 U1.14 ; U1.31 143.05,24.72 v1(143,24.77) ; v1(147.83,27.94) 147.68,27.79 U1.28 ; U3.22 99.88,20.27 100.2,19.94 v1(100.33,19.94) ; U1.6 154.9,13.38 v1(155.32,12.95) ; U4.15 122.25,16.17 v1(122.54,15.88) ; U3.50 112.68,16.44 113.12,16 v1(113.41,16) ; v1(106.05,12.7) 105.96,12.61 LED1.4 ; P16.20 133.12,15.09 v1(133.35,14.86)
  TOP w0.381: C24.1 v1(133.99,34.29) ; R25.1 v1(92.71,20.95) ; C25.1 v1(133.99,35.56) ; R27.2 v1(128.27,35.56)
  PWR03 w0.178: 135.59,33.66 P14.6 ; P14.6 136.53,34.59 ; P14.6 136.53,32.72
  BOTTOM w0.279: v1(114.43,31.37) 114.78,31.01 C42.2 ; v1(101.85,15.75) 102.23,16.13 C43.2
  BOTTOM w0.305: C18.1 158.01,21.69 v1(158.12,21.59) ; v1(158.12,15.24) 157.35,16 R18.2 ; v1(100.33,21.49) 100.23,21.59 C40.2 ; v1(146.07,4.72) P18.20 146.07,7.72 v1(145.92,7.87) ; v1(150.88,12.19) 150.5,12.57 C19.1 ; R20.2 v1(160.02,15.24) ; v1(117.6,10.92) 117.45,11.07 C50.1 116.56,10.79 U6.8 ; C44.2 v1(97.79,26.04) ; C17.1 v1(155.32,12.95) ; C26.1 v1(123.34,15.9) ; R14.2 v1(143,24.77)
  BOTTOM w0.381: C41.2 v1(100.97,33.66)
  vias: v1(100.97,12.7) v1(101.98,12.7) v1(113.16,34.54) v1(114.43,34.54) v1(119.38,32.64) v1(119.38,31.5) v1(120.78,32.64) v1(120.78,31.5)
VDD_3V3_USER: length 7.8
  TOP w0.178: PSM1.1 34.77,9.17 36.2,7.75 P9.2
VDD_3V3_USER_EN: length 3.9
  TOP w0.178: v1(49.53,21.59) 49.3,21.36 PSM1.9
  BOTTOM w0.178: v1(49.53,21.59) R1.1 R2.2
VDD_5V_BACKUP: length 10.3
  TOP w0.381: 24.77,25.78 24.77,29.21 26.04,30.48 26.04,34.67 25.78,34.92 R10.1
  vias: v1(13.34,25.4) v1(13.34,24.13) v1(13.97,39.62) v1(13.97,38.35) v1(14.61,25.4) v1(14.61,24.13) v1(15.24,39.62) v1(15.24,38.35)
VDD_5V_BRICK: length 0.8
  TOP w0.381: R5.1 26.04,19.05
  vias: v1(13.34,9.53) v1(13.34,8.26) v1(14.61,9.53) v1(14.61,8.26)
VDD_5V_FLOW: length 6.3
  TOP w0.381: 127.51,33.15 132.84,33.15 133.22,32.77 R17.1
  vias: v1(95.25,34.29) v1(96.52,34.29) v1(125.09,35.56) v1(125.09,34.29)
VDD_5V_HIPOWER: length 7.8
  TOP w0.381: v1(42.78,10.29) PSM1.5 v1(42.78,12.95) ; P9.1 38.73,5.38 ; P9.1 39.67,4.45 ; P9.1 38.73,3.51
  BOTTOM w0.381: 38.73,5.38 P9.1 39.67,5.38
  vias: v1(39.37,7.62) v1(39.37,6.35) v1(40.64,7.62) v1(40.64,6.35) v1(130.18,25.4) v1(130.18,24.13) v1(131.44,25.4) v1(131.44,24.13)
VDD_5V_HIPOWER_OC: length 35
  TOP w0.178: v1(53.34,20.32) 50.38,17.36 PSM1.7 ; P1.45 67.97,29.83 67.72,29.59 59.39,29.59 58.12,30.86 52.45,30.86 v1(52.07,30.48)
  BOTTOM w0.178: v1(53.34,20.32) 52.7,20.95 52.7,29.84 v1(52.07,30.48)
VDD_5V_IN_PROT: length 4.2
  TOP w0.254: P1.61 63.97,31.37 63.71,31.62 v1(63.63,31.62) 63.46,31.46 P1.63
  TOP w0.381: v1(63.63,31.62) v1(63.63,32.51)
  BOTTOM w0.381: R1.2 51.31,20.57
  vias: v1(42.29,35.81) v1(43.43,35.81)
VDD_5V_PERIPH: length 12.9
  TOP w0.381: v1(40.78,12.95) PSM1.4 v1(40.78,10.29) ; S1.1 v1(63.5,10.41) ; L3.1 v1(28.7,41.27) ; 101.17,9.53 P2.1 ; P2.1 103.3,9.53 ; P2.1 102.23,8.46 ; P2.1 102.23,10.59 ; L2.1 v1(68.07,11.3) ; L1.1 v1(56.64,11.3) ; P5.1 v1(91.41,6.96) ; L4.1 v1(79.5,11.3)
  vias: v1(95.89,4.45) v1(97.16,4.45) v1(98.42,4.45)
VDD_5V_PERIPH_EN: length 35.3
  TOP w0.178: PSM1.10 50.04,23.37 50.16,23.5 56.01,23.5 57.43,22.07 57.43,21.94 v1(57.78,21.59) ; v1(59.94,28.32) 60.45,27.81 70.99,27.81 72.47,29.29 P1.27 72.47,31.8 v1(72.26,32)
  BOTTOM w0.178: v1(57.78,21.59) 57.15,22.23 57.15,23.24 59.05,25.15 59.05,27.43 v1(59.94,28.32)
VDD_5V_PERIPH_OC: length 32.1
  TOP w0.178: v1(53.34,21.59) 51.1,19.36 PSM1.8 ; P1.43 68.46,29.48 68.07,29.08 59.31,29.08 58.17,30.23 v1(53.34,30.23)
  BOTTOM w0.178: v1(53.34,30.23) 53.34,29.73 53.34,29.73 v1(53.34,21.59)
VDD_BACKUP_VALID: length 31.3
  TOP w0.178: P1.57 64.97,32.82 64.14,33.66 48.84,33.66 46.94,31.76 40.56,31.76 38.78,33.54 PSM1.17
VDD_BRICK_VALID: length 30.3
  TOP w0.178: PSM1.16 40.78,33.26 41.78,32.26 46.74,32.26 48.77,34.29 64.28,34.29 65.46,33.1 P1.55
VDD_SERVO: length 29.9
  TOP w0.178: 40.51,37.47 S6.1 43.94,37.47 46.48,34.92 64.35,34.92 65.97,33.31 P1.53
VDD_SERVO_IN: length 51.5
  TOP w0.178: P1.9 76.99,28.85 75.56,27.43 59.94,27.43 57.91,29.46 50.67,29.46 50.04,30.09 49.03,30.09 48.51,30.61 36.83,30.61 34.77,32.66 PSM1.19
  TOP w0.254: L5.2 34.75,36.94 34.77,36.92 PSM1.19
ADC123_IN10: length 41.5
  TOP w0.178: v1(132.08,21.59) 136.53,26.04 ; U3.15 99.96,23.77 100.33,23.39 v1(100.33,22.86)
  BOTTOM w0.178: v1(132.08,21.59) 131.58,21.59 131.46,21.46 109.73,21.46 108.84,20.57 102.49,20.57 100.68,22.38 100.68,22.51 v1(100.33,22.86)
ALARM: length 32.9
  TOP w0.178: v1(57.78,22.86) 57.78,25.02 55.42,27.38 PSM1.12 ; P1.24 73.48,26.06 72.62,26.92 68.71,26.92 68.58,27.05 60.96,27.05 60.58,26.67 v1(59.69,26.67)
  BOTTOM w0.178: v1(57.78,22.86) 59.69,24.77 v1(59.69,26.67)
AUX_BATT_CURRENT_SENS: length 76.3
  TOP w0.178: v1(69.85,38.1) 72.97,34.98 P1.25 ; v1(64.14,38.1) 63.5,38.73 53.98,38.73 50.55,42.16 33.91,42.16 v1(30.48,38.73) ; v1(9.91,40.64) 9.84,40.71 K4.1
  BOTTOM w0.178: v1(69.85,38.1) v1(64.14,38.1) ; v1(30.48,38.73) 30.1,38.35 20.07,38.35 17.78,40.64 v1(9.91,40.64) 10.29,41.02 10.29,42.02 10.31,42.05 C12.2
AUX_BATT_VOLTAGE_SENS: length 69.4
  TOP w0.178: v1(71.75,37.47) 73.48,35.74 P1.23 ; v1(62.23,37.47) 53.47,37.47 49.78,41.15 35.69,41.15 32,37.47 v1(17.14,37.47)
  BOTTOM w0.178: R11.1 R13.2 16.38,35.69 16.64,35.94 16.64,36.96 v1(17.14,37.47) ; v1(62.23,37.47) v1(71.75,37.47)
BAT_ESC:
  vias: v1(2.54,42.55) v1(2.54,41.27) v1(2.54,40.01) v1(3.17,12.7) v1(3.17,11.43) v1(3.81,42.55) v1(3.81,41.27) v1(3.81,40.01) v1(4.06,12.7) v1(4.06,11.43) v1(5.08,42.55) v1(5.08,41.27) v1(5.08,40.01) v1(6.35,42.55) v1(6.35,41.27) v1(6.35,40.01)
BATT_CURRENT_SENS_PROT: length 88.5
  TOP w0.178: K3.1 6.66,13.14 v1(6.73,13.21) 8.13,14.61 v1(13.97,14.61) ; P1.49 66.97,33.98 64.75,36.2 52.83,36.2 49.02,40.01 35.94,40.01 32.64,36.7 32.64,35.94 32.26,35.56 31.11,35.56 v1(30.48,36.2)
  BOTTOM w0.178: v1(13.97,14.61) 13.97,20.7 15.49,22.23 21.34,22.23 25.41,26.3 25.41,31.12 v1(30.48,36.2) ; R6.1 5.55,11.94 5.58,11.91 C1.2 6.35,12.83 v1(6.73,13.21)
BATT_VOLTAGE_SENS_PROT: length 72.7
  TOP w0.178: v1(31.75,36.2) 32.1,36.55 32.1,36.8 35.94,40.64 49.34,40.64 53.15,36.83 65.02,36.83 67.46,34.39 P1.47
  BOTTOM w0.178: v1(31.75,36.2) 31.4,35.84 31.4,35.72 26.04,30.35 26.04,26.04 21.59,21.59 17.14,21.59 16.64,21.08 16.64,20.07 16.38,19.81 R8.2 15.88,18.92 ; 15.88,18.92 R7.1 ; 15.88,18.92 14.61,18.92
BUZZER_OUT: length 13.2
  TOP w0.178: v1(49.53,29.21) 49.38,29.36 PSM1.13
  BOTTOM w0.178: v1(49.53,29.21) 49.53,34.29 P11.1
CAN_H_2: length 45.4
  TOP w0.178: P7.2 32.39,43.18 33.02,42.55 51.05,42.55 54.23,39.37 64.26,39.37 68.97,34.67 P1.41
CAN_L_2: length 44.6
  TOP w0.178: 69.47,30.61 69.47,34.8 64.26,40.01 54.36,40.01 51.18,43.18 33.82,43.18 33.65,43.35 P7.3
D_N: length 4
  TOP w0.229: J1.2 132.06,41.9 131.93,42.02 130.92,42.02 130.56,41.66 129.79,41.66 R26.2
D_P: length 4
  TOP w0.229: R28.2 129.9,42.06 130.39,42.06 130.75,42.42 131.93,42.42 132.06,42.55 J1.3
FMU-SWCLK: length 38.2
  TOP w0.178: P1.3 78.49,31.75 79.12,32.38 81.28,32.38 87,26.67 87,13.73 93.74,6.99 97.16,6.99
FMU-SWDIO: length 40.6
  TOP w0.178: 99.69,6.99 98.42,5.71 94.11,5.71 86.36,13.46 86.36,26.04 80.52,31.88 79.25,31.88 78.97,31.6 P1.1
I2C_2_SCL: length 33.9
  TOP w0.178: P1.6 77.98,24.38 v1(77.72,24.13) ; R22.1 v1(103.5,37.47)
  BOTTOM w0.178: v1(77.72,24.13) 78.36,23.5 81.66,23.5 95.11,36.94 102.98,36.94 v1(103.5,37.47)
I2C_2_SDA: length 31
  TOP w0.178: P1.4 78.49,24.38 v1(78.74,24.13) ; R23.1 v1(102.23,37.47)
  BOTTOM w0.178: v1(78.74,24.13) 81.66,24.13 95,37.47 v1(102.23,37.47)
IO-CH1-PROT: length 53.1
  TOP w0.178: N5.1 25.9,5.45 34.04,13.59 47.75,13.59 55.12,20.95 58.42,20.95 59.46,22 P1.80
IO-CH2-PROT: length 71.6
  TOP w0.178: v1(62.87,23.5) 60.33,23.5 59.97,23.85 P1.78 ; v1(88.27,43.18) 90.68,43.18 93.98,46.48 100.97,46.48 105.54,41.91 113.67,41.91 114.33,42.57 N6.1
  BOTTOM w0.178: v1(62.87,23.5) 71.75,23.5 86.36,38.1 86.36,41.27 v1(88.27,43.18)
IO-CH3-PROT: length 66.7
  TOP w0.178: v1(62.87,22.23) 63.63,22.99 63.63,23.62 63.02,24.23 60.61,24.23 60.46,24.37 P1.76 ; v1(90.17,19.05) 95.25,13.97 97.54,13.97 100.33,11.18 102.87,11.18 105.79,8.26 114.43,8.26 115.54,7.14 N7.1
  BOTTOM w0.178: v1(62.87,22.23) 87,22.23 v1(90.17,19.05)
IO-CH4-PROT: length 77.5
  TOP w0.178: v1(68.07,31.75) 68.07,34.54 65.15,37.47 63.5,37.47 62.87,38.1 53.72,38.1 50.16,41.66 35.31,41.66 31.62,37.97 19.81,37.97 15.27,42.52 N8.1 ; v1(67.94,26.42) 61.14,26.42 60.97,26.24 P1.74
  BOTTOM w0.178: v1(67.94,26.42) 67.94,31.13 68.07,31.25 v1(68.07,31.75)
IO-LED_SAFET_PROT: length 38.8
  TOP w0.178: P1.28 72.47,24.05 74.68,21.84 74.68,4.57 76.07,3.17 78.87,3.17 80.77,5.08 85.72,5.08 86.74,4.06 88.58,4.06 88.9,4.38 P5.3
IO-SWCLK: length 57.3
  TOP w0.178: 97.16,9.53 92.96,9.53 88.27,14.22 88.27,27.3 81.92,33.66 v1(77.47,33.66) ; v1(60.96,32.13) 61.31,31.78 61.31,31.54 61.46,31.38 P1.71
  BOTTOM w0.178: v1(60.96,32.13) 60.96,33.02 62.23,34.29 76.83,34.29 v1(77.47,33.66)
IO-SWDIO: length 59.2
  TOP w0.178: v1(61.85,31.75) 61.97,31.63 P1.69 ; P2.3 98.42,10.79 96.01,10.79 95.5,10.29 92.96,10.29 88.98,14.27 88.98,27.6 82.3,34.29 76.83,34.29 v1(76.2,33.66)
  BOTTOM w0.178: v1(76.2,33.66) 74.3,33.66 74.17,33.53 62.48,33.53 61.85,32.89 v1(61.85,31.75)
NETC5_1: length 2.4
  TOP w0.381: K1.1 C5.1
NETC5_2: length 1.5
  TOP w0.381: C5.2 25.25,15.01
  vias: v1(22.86,14.61) v1(22.86,13.34) v1(22.86,12.06)
NETC13_1: length 2.4
  TOP w0.381: K2.1 C13.1
NETC13_2: length 2.8
  TOP w0.381: C13.2 25.25,31.6 24.77,31.11 24,31.11 23.62,30.73
  vias: v1(22.86,30.48) v1(22.86,29.21) v1(22.86,27.94)
NETC27_1: length 1.5
  TOP w0.305: U4.14 121.59,15.95 v1(121.67,15.88)
  BOTTOM w0.305: C27.1 121.77,15.98 v1(121.67,15.88)
NETC30_1: length 9.8
  TOP w0.178: U3.14 97.67,24.27 97.41,24 97.41,22.73 96.89,22.21 96.88,22.23 C30.1 94.46,21.45 94.49,21.42 R25.2 94.49,20.48 93.98,19.97 S7.1
NETC31_2: length 2.2
  TOP w0.178: U3.73 v1(113.08,29.76)
  BOTTOM w0.178: C31.2 113.03,29.72 v1(113.08,29.76)
NETC32_2: length 2.2
  TOP w0.178: U3.49 112.18,18.2 v1(112.39,18.41)
  BOTTOM w0.178: C32.2 v1(112.39,18.41)
NETD1_C: length 3.5
  TOP w0.381: P3.1 56.49,6.83 56.64,6.99 56.64,7.09 56.65,7.1 D1.C 56.65,8.14 56.64,8.15 L1.2
NETD3_C: length 3.3
  TOP w0.381: L3.2 31.29,42.23 D3.C 30.98,42.8 31.14,42.96 P7.1
NETD4_C: length 3.5
  TOP w0.381: P10.1 79.35,6.83 79.5,6.99 79.5,7.09 79.51,7.1 D4.C 79.51,8.14 79.5,8.15 L4.2
NETD5_C: length 3.2
  TOP w0.178: D300.C 39.04,37.47 39.03,37.47 D5.C 37.45,37.47 37.44,37.47 L5.1
NETD8_1: length 11.5
  TOP w0.279: U3.68 115.44,27.26
  TOP w0.381: v1(125.77,27.3) v1(124.5,27.3) 123.9,27.3 123.77,27.18 115.53,27.18 115.44,27.26
  vias: v1(129.29,36.96) v1(130.3,36.96)
NETD9_1: length 1.3
  TOP w0.178: D9.1 130.04,35.08 130.05,35.09 R27.1
NETJ1_4: length 3.9
  TOP w0.178: J1.4 131.68,43.19 131.06,43.81 R29.2
NETK1_4: length 3.7
  TOP w0.381: R5.2 R4.1 K1.4
NETK2_4: length 3.7
  TOP w0.381: R10.2 R9.1 K2.4
NETL10_1: length 2.4
  TOP w0.381: L10.1 P17.1
NETL11_1: length 5.2
  TOP w0.178: P17.8 113.67,40.31 ; P17.8 112.73,39.37 ; P17.8 114.6,39.37
  TOP w0.381: L11.1 P17.8
NETLED1_1: length 1.9
  TOP w0.178: R32.1 106.68,13.07 107.4,12.35 LED1.1
NETLED1_2: length 3.4
  TOP w0.178: R33.1 107.95,12.83 108.33,12.45 108.33,11.29 108.05,11.01 LED1.2
NETLED1_3: length 3.5
  TOP w0.178: R34.1 104.14,12.4 105.54,11.01 LED1.3
NETP17_2: length 2.7
  TOP w0.178: R30.1 98.42,39.37
NETP17_3: length 2.7
  TOP w0.178: R31.1 P17.3
NETP17_5: length 18.6
  TOP w0.178: U3.72 115.27,29.26 115.44,29.44 115.44,31.37 109.86,36.96 109.86,40.01 109.22,40.64 107.31,40.64 P17.5
NETP17_6: length 8.6
  TOP w0.178: 108.58,39.37 108.58,37.59 112.68,33.5 U3.76
NETR18_1: length 3
  TOP w0.178: v1(158.05,16.57) 157.91,16.71 U1.8
  BOTTOM w0.178: R18.1 157.61,17.02 v1(158.05,16.57)
NETR20_1: length 6.7
  TOP w0.178: U1.10 158.34,18.31 v1(159.13,17.53)
  BOTTOM w0.178: R20.1 159.64,17.02 v1(159.13,17.53) 158.24,18.41 156.97,18.41
NETR21_2: length 2.9
  TOP w0.178: R21.2 105.41,15.11 106.18,15.88 U3.37
NETR24_2: length 2.8
  TOP w0.178: U3.94 103.68,33.7 103.89,33.91 v1(104.14,33.91)
  BOTTOM w0.178: v1(104.14,33.91) R24.2
NETR26_1: length 22.9
  TOP w0.229: U3.70 115.5,28.26 115.54,28.31 115.94,28.31 116.41,28.78 116.41,34.11 119.63,37.34 123.19,37.34 127.56,41.71 127.97,41.71 R26.1
NETR28_1: length 22.9
  TOP w0.229: U3.71 115.5,28.76 115.54,28.72 115.77,28.72 116,28.95 116,34.28 119.47,37.74 123.02,37.74 127.39,42.11 127.97,42.11 R28.1
NETR29_1: length 34.3
  TOP w0.178: U3.69 123.01,27.76 v1(123.83,28.57) ; R29.1 v1(127.64,43.81)
  BOTTOM w0.178: v1(127.64,43.81) 127.64,35.43 128.14,34.92 129.41,34.92 131.44,32.89 131.44,30.99 129.03,28.57 v1(123.83,28.57)
NETR32_2: length 2.6
  TOP w0.178: U3.38 R32.2
NETR33_2: length 20.8
  TOP w0.178: v1(107.95,18.41) 106.05,20.32 106.05,25.15 100.43,30.76 U3.1 ; R33.2 v1(107.95,15.24)
  BOTTOM w0.178: v1(107.95,18.41) v1(107.95,15.24)
NETR34_2: length 19.7
  TOP w0.178: v1(104.78,18.41) 104.78,18.91 105.41,19.55 105.41,25.15 100.29,30.26 U3.2 ; v1(104.78,15.62) 104.14,14.99 R34.2
  BOTTOM w0.178: v1(104.78,18.41) v1(104.78,15.62)
OSC_IN: length 6.8
  TOP w0.178: X1.3 93.12,26.41 94.08,25.45 96.01,25.45 96.49,25.93 C29.2 96.55,25.93 97.21,25.26 U3.12
OSC_OUT: length 4.7
  TOP w0.178: X1.1 94.84,24.35 95.5,25.02 96.11,25.02 C28.1 97.02,24.61 97.17,24.77 U3.13
OTG_DM1: length 37.4
  TOP w0.229: P1.33 70.97,31.52 71.02,31.57 71.02,34.65 64.52,41.15 54.48,41.15 51.71,43.92 44.48,43.92 43.66,44.73 43.66,45.21 43.15,45.72 P12.3
OTG_DP1: length 37.5
  TOP w0.229: P1.31 71.48,31.52 71.42,31.57 71.42,34.81 64.68,41.55 54.65,41.55 51.88,44.32 44.64,44.32 44.07,44.9 44.07,45.47 44.32,45.72 P12.2
PA2_TIM5_CH3_EXPOSURE: length 70
  TOP w0.178: P16.3 128.16,6.59 123.32,11.43 120.4,11.43 117.86,8.89 105.66,8.89 102.62,11.94 102.62,14.1 102.11,14.61 100,14.61 98.98,15.62 U3.25 ; U1.23 151.69,27.74 152.02,28.07 v1(154.31,28.07)
  BOTTOM w0.178: P18.3 154.58,17.54 155.57,18.54 155.57,26.8 v1(154.31,28.07)
PA3_TIM5_CH4_STANDBY: length 76.3
  TOP w0.178: U1.33 146.56,23.12 v1(147.32,23.88) ; U3.26 100.68,16.09 101.65,15.11 102.74,15.11 103,14.86 103,12.19 105.79,9.4 117.6,9.4 120.14,11.94 123.44,11.94 128.29,7.09 P16.4
  BOTTOM w0.178: v1(147.32,23.88) 148.46,25.02 148.46,28.45 149.48,29.46 152.15,29.46 155.07,26.54 155.07,18.75 154.07,17.75 P18.4
PA4_DCMI_HSYNC: length 103.7
  TOP w0.178: U1.20 154.09,24.94 152.36,23.21 152.12,23.21 v1(151.76,22.86) ; P15.5 99.6,42.39 v1(99.69,42.29) ; v1(100.97,24.77) 100.97,19.63 102.18,18.41 U3.29 ; v1(92.71,29.84) 91.57,30.99 91.57,34.8 v1(90.81,35.56) ; P16.16 130.29,13.09 128.78,14.61 128.78,21.08 125.48,24.38 123.69,24.38 123.19,24.88 121.81,24.88 v1(121.28,25.4)
  BOTTOM w0.178: v1(121.28,25.4) 120.69,26 104.48,26 103.25,24.77 v1(100.97,24.77) 98.3,24.77 95.76,27.3 95.76,27.69 94.87,28.57 93.98,28.57 v1(92.71,29.84) ; v1(90.81,35.56) 91.44,35.56 94.49,38.61 94.49,41.05 95.09,41.66 99.06,41.66 v1(99.69,42.29) ; P18.16 148.07,12.58 147.32,13.34 147.32,18.91 151.27,22.86 v1(151.76,22.86)
PA5_CAM_NRESET: length 116.5
  TOP w0.178: P15.7 98.6,42.5 v1(98.81,42.29) ; v1(100.33,27.69) 100.33,27.06 101.6,25.79 101.6,19.62 102.68,18.54 U3.30 102.68,16.13 103.5,15.3 103.5,12.32 105.98,9.85 117.29,9.85 119.96,12.51 123.63,12.51 128.56,7.59 P16.5 ; v1(92.71,31.11) 92.08,31.75 92.08,35.56 v1(90.81,36.83) ; U1.32 146.26,23.92 v1(146.3,23.88)
  BOTTOM w0.178: v1(98.81,42.29) 93.85,42.29 92.08,40.51 92.08,38.1 v1(90.81,36.83) ; P18.5 153.58,17.96 154.58,18.96 154.58,26.15 151.76,28.96 149.86,28.96 148.97,28.07 148.97,24.38 147.83,23.24 146.94,23.24 v1(146.3,23.88) 145.92,23.5 C23.1 145.26,23.99 145.29,24.02 R14.1 ; v1(92.71,31.11) 93.73,30.1 97.92,30.1 v1(100.33,27.69)
PA6_DCMI_PCLK: length 83.4
  TOP w0.178: P16.18 130.31,14.09 129.79,14.61 129.79,21.59 126.11,25.27 125.08,25.27 124.96,25.4 v1(124.46,25.4) ; v1(146.69,12.06) 147.96,12.06 148.49,12.6 U1.46 ; v1(102.23,25.4) 102.23,24.77 102.87,24.13 102.87,18.98 103.18,18.67 U3.31 ; P15.16 94.1,42.2 92.33,40.43 92.33,38.23 93.34,37.21 93.34,31.75 95.89,29.21 v1(95.89,28.57)
  BOTTOM w0.178: v1(146.69,12.06) 146.69,8.64 147.07,8.25 P18.18 ; v1(124.46,25.4) 123.83,24.77 122.81,24.77 120.9,26.67 104.14,26.67 102.87,25.4 v1(102.23,25.4) 100.97,26.67 98.29,26.67 96.38,28.57 v1(95.89,28.57)
PB6_DCMI_D5: length 88.1
  TOP w0.178: U1.17 155.11,23.92 154.31,23.11 154.31,22.86 v1(153.03,21.59) ; v1(100.33,40.64) 101.6,40.64 102.36,39.88 102.36,38.48 102.74,38.1 103.76,38.1 104.68,37.18 U3.92 104.68,31.49 105.03,31.14 105.03,29.08 107.7,26.42 107.7,22.61 v1(106.68,21.59) ; v1(122.56,23.5) 122.84,23.21 125.13,23.21 127.64,20.7 127.64,13.97 130.02,11.59 P16.13 ; v1(95.5,40.64) 95.5,41.14 95.6,41.23 P15.13
  BOTTOM w0.178: v1(122.56,23.5) 121.28,22.23 107.82,22.23 107.19,21.59 v1(106.68,21.59) ; P18.13 149.58,18.89 151.64,20.95 152.4,20.95 v1(153.03,21.59) ; v1(95.5,40.64) v1(100.33,40.64)
PB7_DCMI_VSYNC: length 100.7
  TOP w0.178: v1(90.81,34.29) 90.81,30.86 92.46,29.21 v1(94.61,29.21) ; U3.93 104.18,31.49 104.52,31.15 104.52,28.83 v1(105.41,27.94) ; P16.17 130.3,13.59 129.16,14.73 129.16,21.34 125.73,24.76 124.19,24.76 123.56,25.4 v1(123.06,25.4) ; P15.3 100.6,42.43 v1(100.46,42.29) ; U1.21 153.3,24.77 152.4,23.88 151.51,23.88 v1(147.96,20.32)
  BOTTOM w0.178: v1(100.46,42.29) 99.44,41.27 95.25,41.27 94.87,40.89 94.87,38.35 v1(90.81,34.29) ; P18.17 147.58,8.38 147.32,8.64 147.32,12.7 146.69,13.34 146.69,19.05 v1(147.96,20.32) ; v1(123.06,25.4) 121.16,27.3 106.05,27.3 v1(105.41,27.94) 104.27,27.94 103.38,27.05 99.57,27.05 97.28,29.34 95.25,29.34 95.12,29.21 v1(94.61,29.21)
PB8_I2C1_SCL: length 9.2
  TOP w0.178: R22.2 v1(103.5,34.92) 103.18,34.6 U3.95 ; v1(98.42,34.92) R30.2
  BOTTOM w0.178: v1(103.5,34.92) v1(98.42,34.92)
PB9_I2C1_SDA: length 4.7
  TOP w0.178: U3.96 102.68,35.24 R23.2 R31.2
PB10_I2C2_SCL: length 93.3
  TOP w0.178: P15.4 100.1,45.44 v1(99.95,45.59) ; U1.25 150.09,27.84 v1(149.99,27.94) ; P16.6 129.2,8.09 122.68,14.61 v1(117.47,14.61) 112.01,14.61 111.18,15.44 U3.47 111.18,24.08 v1(107.31,27.94) ; v1(108.58,34.29) 108.58,35.56 v1(106.68,37.47)
  BOTTOM w0.178: v1(106.68,37.47) 105.66,37.47 104.65,38.48 104.65,40.39 99.95,45.09 v1(99.95,45.59) ; v1(117.47,14.61) 116.2,13.34 115.2,13.34 ; v1(108.58,34.29) 108.58,30.61 107.31,29.34 v1(107.31,27.94) ; P18.6 153.07,18.16 154.07,19.16 154.07,25.76 151.26,28.57 150.62,28.57 v1(149.99,27.94) 149.86,27.81 R15.2
PB11_I2C2_SDA: length 91.6
  TOP w0.178: v1(107.95,37.47) 109.86,35.56 v1(109.86,34.29) ; v1(150.88,27.94) 150.88,27.44 150.9,27.43 U1.24 ; P16.7 129.33,8.59 122.68,15.24 v1(116.84,15.24) 112.15,15.24 111.68,15.71 U3.48 111.68,24.34 108.58,27.43 v1(108.58,27.94) ; P15.6 99.1,45.43 v1(98.93,45.59)
  BOTTOM w0.178: v1(98.93,45.59) 99.57,46.23 100.33,46.23 100.97,45.59 100.97,44.7 105.03,40.64 105.03,38.86 105.66,38.23 107.19,38.23 v1(107.95,37.47) ; v1(108.58,27.94) 108.58,29.84 109.86,31.11 v1(109.86,34.29) ; 151.13,27.69 153.58,25.24 153.58,19.37 152.58,18.37 P18.7 ; 151.13,27.69 R16.2 ; 151.13,27.69 v1(150.88,27.94) ; U6.5 116.2,14.61 v1(116.84,15.24)
PB12_SPI2_NSS: length 10.7
  TOP w0.178: v1(123.57,20.07) 123.52,20.12 U4.5 ; v1(117.22,19.05) 116.59,18.41 115.96,18.41 115.61,18.77 U3.51
  BOTTOM w0.178: v1(117.22,19.05) 118.24,20.07 v1(123.57,20.07)
PB13_SPI2_SCK: length 10.1
  TOP w0.178: U4.2 123.07,18.09 122.94,18.23 121.86,18.23 v1(121.41,17.78) ; v1(116.2,19.05) 115.99,19.27 U3.52
  BOTTOM w0.178: v1(121.41,17.78) 120.9,18.29 116.97,18.29 v1(116.2,19.05)
PB14_SPI2_MISO: length 9.9
  TOP w0.178: v1(118.24,19.05) 117.6,19.68 115.44,19.68 115.36,19.77 U3.53 ; U4.4 122.64,19.39 v1(122.56,19.3)
  BOTTOM w0.178: v1(118.24,19.05) 118.75,19.56 121.81,19.56 122.06,19.3 v1(122.56,19.3)
PB15_SPI2_MOSI: length 12.4
  TOP w0.178: v1(124.46,19.03) 124.17,18.74 U4.3 ; U3.54 115.86,20.27 116.04,20.45 v1(116.33,20.45)
  BOTTOM w0.178: v1(116.33,20.45) 121.92,20.45 122.17,20.7 123.7,20.7 124.11,20.29 124.11,19.38 v1(124.46,19.03)
